# Altium PCB pechatka_100x60_fabric_v2.PcbDoc
Units mm, origin at the board's own origin, x right, y up, seen from the top; angles counter-clockwise.
Board outline 94 x 54 mm, 2 copper layers (Top Layer, Bottom Layer); 142 components, 101 nets, 463 pads, 20 vias.
Unrouted connection lines stored in the file: 48.
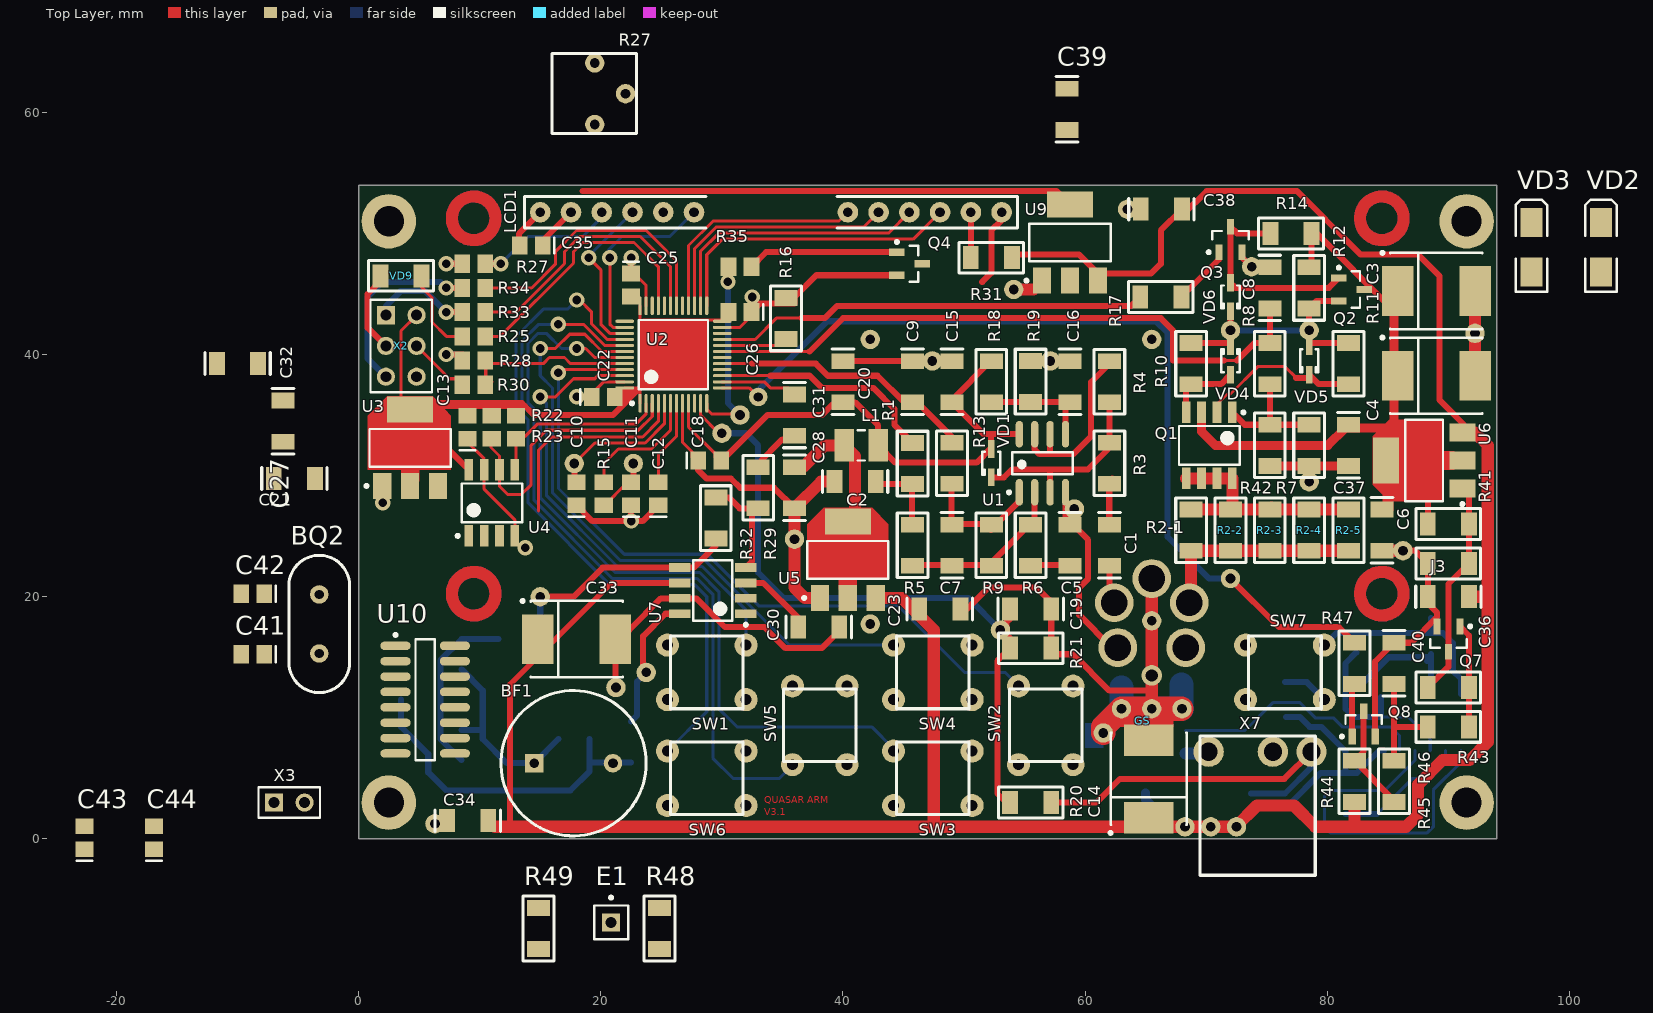
[diagram p0: Top Layer view]
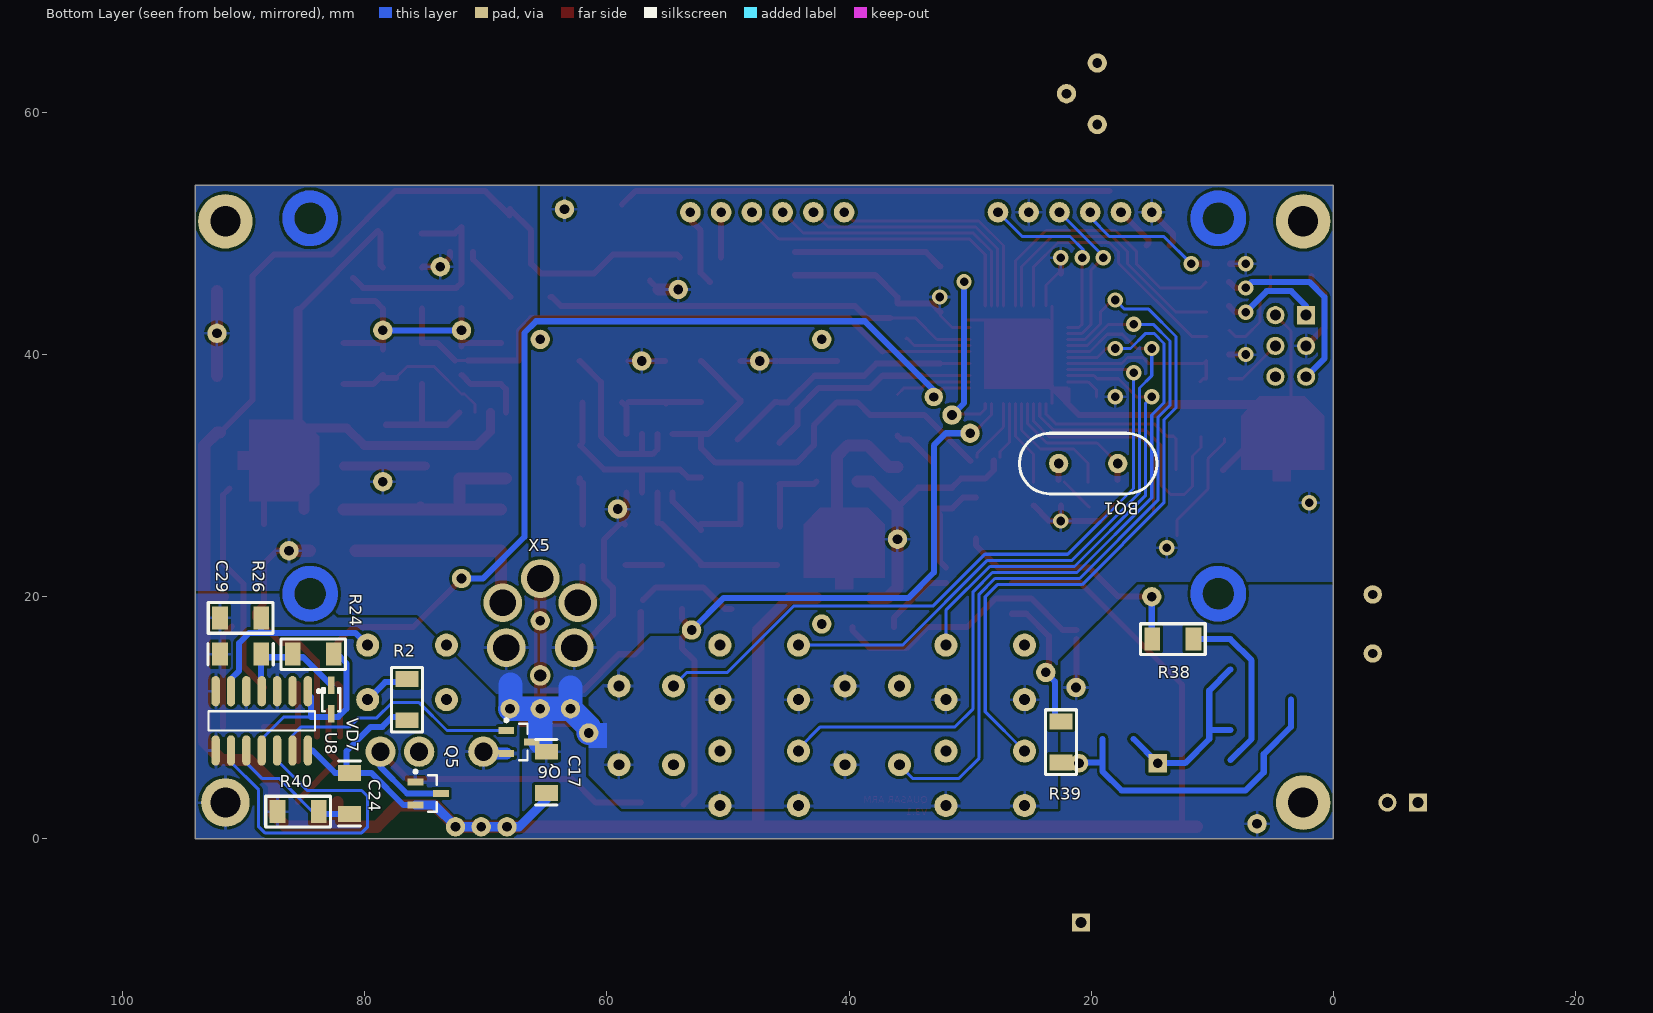
[diagram p1: Bottom Layer view, seen from below]

## Layer stack, top to bottom
Top Solder: solder mask 0.0102, Solder Resist, Dk 3.5
Top Layer: signal copper 0.0356
Dielectric 1: dielectric 0.32, FR-4, Dk 4.8
Bottom Layer: signal copper 0.0356
Bottom Solder: solder mask 0.0102, Solder Resist, Dk 3.5

## Board outline
0,0 94,0 94,54 0,54

## Design rules (kind name [scope] priority, off if disabled: settings)
Clearance Clearance_GS [InComponent('GS') vs InComponent('C14')] p1: gap=-10 ignorepadtopadclearanceinfootprint=FALSE except(0: Arc-Hole Track-Hole SMDPad-Hole THPad-Hole Via-Hole Fill-Hole Poly-Hole Region-Hole Text-Hole)
Clearance [All] p2: gap=0.25 ignorepadtopadclearanceinfootprint=FALSE except(0: Arc-Hole Track-Hole SMDPad-Hole THPad-Hole Via-Hole Fill-Hole Poly-Hole Region-Hole Text-Hole)
ComponentClearance ComponentClearance_GS [InComponent('GS') vs InComponent('C14')] p1: gap=0 collisioncheckmode=3 verticalgap=0.254 showdistances=FALSE
ComponentClearance [All] p2: gap=0.254 collisioncheckmode=3 verticalgap=0.254 showdistances=FALSE
MatchedLengths MatchLengths_xSignals_C14_C36_1 [InxSignalClass('xSignals_C14_C36_MatchLengthsClass')] p1: tolerance=2.54 checknetsindiffpair=FALSE checkdiffpairvsdiffpair=TRUE checkxsignals=TRUE checkothers=TRUE
MatchedLengths MatchLengths_C14_Passives_C36 [InxSignalClass('xSignals_C14_Passives_C36_MatchLengthsClass')] p2: tolerance=2.54 checknetsindiffpair=FALSE checkdiffpairvsdiffpair=TRUE checkxsignals=TRUE checkothers=TRUE
MatchedLengths MatchLengths_xSignals_C14_Passives [InxSignalClass('xSignals_C14_Passives_MatchLengthsClass')] p3: tolerance=2.54 checknetsindiffpair=FALSE checkdiffpairvsdiffpair=TRUE checkxsignals=TRUE checkothers=TRUE
MatchedLengths MatchLengths_xSignals_C14_C36 [InxSignalClass('xSignals_C14_C36_MatchLengthsClass')] p4: tolerance=2.54 checknetsindiffpair=FALSE checkdiffpairvsdiffpair=TRUE checkxsignals=TRUE checkothers=TRUE
PolygonConnect [All] p1: connectstyle=Relief reliefconductorwidth=0.254 reliefentries=4 polygonreliefangle="90 Angle" airgapwidth=0.254
RoutingVias [All] p1: holewidth=0.711 width=1.27 viastyle="Through Hole" minholewidth=0.711 minwidth=1.27 maxholewidth=0.711 maxwidth=1.27
SolderMaskExpansion [All] p1: expansion=0.102
Width [All] p1: maxlimit=3 minlimit=0.25 preferedwidth=0.254 minimp=50.000000 maximp=50.000000 favimp=50.000000
29 further rules are at their usual default settings.

## Classes and differential pairs
component class Transmitter: C3 C4 C6 C8 Q1 Q2 Q3 R2-1 R2-2 R2-3 R2-4 R2-5 R7 R8 R10 R11 R12 R14 R17 R42 VD2 VD3 VD4 VD5 VD6
component class SoundBlock: BF1 BQ2 C30 C31 C32 C33 C34 C41 C42 C43 C44 E1 R29 R32 R38 R39 R48 R49 U7 U10 X3
component class ReceiverBlock: C1 C2 C5 C7 C9 C15 C16 R1 R3 R4 R5 R6 R9 R13 R18 R19 U1 VD1 X5
component class "Power block": C14 C17 C18 C19 C20 C21 C22 C23 C24 C25 C26 C27 C28 C29 C36 C37 C38 C39 C40 GS J3 L1 Q5 Q6 Q7 Q8 R2 R2-1 R20 R21 R24 R26 R40 R41 R43 R44 R45 R46 R47 SW7 U3 U5 U6 U8 U9 VD7 X7
component class "Microcontroller block": BQ1 C10 C11 C12 C13 C35 LCD1 Q4 R15 R16 R22 R23 R25 R27 R28 R30 R31 R33 R34 R35 U2 U4 VD9 X2
component class Keyboard_on_board: SW1 SW2 SW3 SW4 SW5 SW6

## Components (designator, comment, footprint, x,y, rotation, side; value= is the part's Value field where it differs from the comment)
BF1 "SOUND" HCM12A 17.75,6.25 r0 top
BQ1 "8,0 MHz" "HC-49/U3H (low profile)"#1 20.25,31 r180 bottom
BQ2 "32768" "HC-49/U3H (low profile)"#2 -3.25,17.75 r270 top
C1 "0.1uF" 1206_SMD_CAPACITOR 62,24.25 r90 top
C2 "4700" 1206_SMD_CAPACITOR 41,29.5 r0 top
C3 "1000.0uF" E 89,45.25 r0 top
C4 "1000.0uF" E 89,38.25 r0 top
C5 "0.033" 1206_SMD_CAPACITOR 58.75,24.25 r90 top
C6 "0.1uF" 1206_SMD_CAPACITOR 84.5,25.5 r270 top
C7 "22pF" 1206_SMD_CAPACITOR 49,24.25 r270 top
C8 "4.7uF" 1206_SMD_CAPACITOR 75.25,45.5 r270 top
C9 "4700" 1206_SMD_CAPACITOR 45.75,37.75 r270 top
C10 "22pF" 0805 18,28.5 r90 top
C11 "22pF" 0805 22.5,28.5 r90 top
C12 "0.1uF" 0805 24.75,28.5 r90 top
C13 "0.1uF" 0805 9,34 r90 top
C14 "470.0uF" E 65.25,4.95 r90 top
C15 "1.0uF" 1206_SMD_CAPACITOR 49,37.75 r90 top
C16 "10uF" 1206_SMD_CAPACITOR 58.75,37.75 r270 top
C17 "0.1uF" 1206_SMD_CAPACITOR 65,5.5 r270 bottom
C18 "0.1uF" 0805 29,31.25 r0 top
C19 "0.1uF" 1206_SMD_CAPACITOR 55.5,19 r180 top
C20 "0.1uF" 1206_SMD_CAPACITOR 40,37.75 r270 top
C21 "10uF" 1206_SMD_CAPACITOR -5.3,29.75 r0 top
C22 "0.1uF" 0805 20.2,36.5 r0 top
C23 "0.1uF" 1206_SMD_CAPACITOR 48,19 r180 top
C24 "1uF" 1206_SMD_CAPACITOR 81.25,3.75 r90 bottom
C25 "0.1uF" 0805 22.5,45.75 r270 top
C26 "0.1uF" 0805 31.5,43.5 r180 top
C27 "10uF" 1206_SMD_Capacitor -6.25,34.5 r90 top
C28 "10uF" 1206_SMD_CAPACITOR 36,29 r90 top
C29 "1uF" 1206_SMD_CAPACITOR 90.25,15.25 r180 bottom
C30 "1uF" 1206_SMD_CAPACITOR 38,17.5 r180 top
C31 "1uF" 1206_SMD_CAPACITOR 36,35 r270 top
C32 "4700" 1206_SMD_CAPACITOR -10,39.25 r180 top
C33 "470.0uF" E 18,16.5 r0 top
C34 "0.1uF" 1206_SMD_CAPACITOR 9,1.5 r180 top
C35 "10uF" 0805 14.25,49 r180 top
C36 "0.1uF" 1206_SMD_CAPACITOR 90,20 r0 top
C37 "10uF" 1206_SMD_CAPACITOR 81.75,32.5 r90 top
C38 "0.1uF" 1206_SMD_Capacitor 66.3,52 r0 top
C39 "10uF" 1206_SMD_Capacitor 58.5,60.25 r90 top
C40 "0.1uF" 1206_SMD_Capacitor 85.5,14.5 r270 top
C41 "22pF" 0805 -8.75,15.25 r180 top
C42 "22pF" 0805 -8.75,20.25 r180 top
C43 "0.1uF" 0805 -22.65,0.1 r90 top
C44 "0.1uF" 0805 -16.9,0.1 r90 top
E1 "Antenna" PIN1 20.85,-6.9 r0 top
GS "Ground setter" GND_POINT 65,8.75 r90 top net-tie
J3 "Устанавливается при отсутствии модуля USER_PWM" 1206_SMD_Resistor 90,22.75 r180 top
L1 "Inductor" 1210 41.5,32.5 r0 top value=100mH
LCD1 "WH1602B" WS1602B-3 15,51.75 r0 top locked
Q1 "IRF7105" SO-2 70.25,32.5 r270 top
Q2 "BC846B" SOT23_N 82,45.375 r0 top
Q3 "BC846B" SOT23_N 72,49.5 r90 top
Q4 "BC846B" SOT23_N 45.5,47.5 r0 top
Q5 "IRLML6401" SOT23_N 74.75,3.75 r180 bottom
Q6 "IRLML0030" SOT23_N 67.25,8 r180 bottom
Q7 "IRLML0030" SOT23_N 90,16.5 r270 top
Q8 "BC846B" SOT23_N 83,9.5 r90 top
R1 "2K" 1206_SMD_Resistor 45.75,31 r270 top
R2 "10" 1206_SMD_Resistor 76.5,11.5 r270 bottom
R2-1 "51" 1206_SMD_Resistor 68.75,25.5 r90 top
R2-2 "51" 1206_SMD_Resistor 72,25.5 r90 top
R2-3 "51" 1206_SMD_Resistor 75.25,25.5 r90 top
R2-4 "51" 1206_SMD_Resistor 78.5,25.5 r90 top
R2-5 "47" 1206_SMD_Resistor 81.75,25.5 r90 top
R3 "100" 1206_SMD_Resistor 62,31.023 r270 top
R4 "2K0" 1206_SMD_Resistor 62,37.75 r90 top
R5 "100K" 1206_SMD_Resistor 45.75,24.25 r270 top
R6 "1K2" 1206_SMD_Resistor 55.5,24.25 r270 top
R7 "1R" 1206_SMD_Resistor 78.5,32.5 r270 top
R8 "10K" 1206_SMD_Resistor 75.25,39.25 r270 top
R9 "100K" 1206_SMD_Resistor 52.25,24.25 r90 top
R10 "1K" 1206_SMD_Resistor 68.75,39.25 r270 top
R11 "1K" 1206_SMD_Resistor 81.75,39.25 r270 top
R12 "100K" 1206_SMD_Resistor 78.5,45.5 r90 top
R13 "2K" 1206_SMD_Resistor 49,31.023 r90 top
R14 "10K" 1206_SMD_Resistor 77,50 r0 top
R15 "390" "0805 Resistor" 20.25,28.5 r90 top
R16 "10K" 1206_SMD_Resistor 35.302,42.979 r90 top
R17 "1K" 1206_SMD_Resistor 66.25,44.75 r180 top
R18 "10K" 1206_SMD_Resistor 52.25,37.75 r90 top
R19 "10K" 1206_SMD_Resistor 55.5,37.773 r270 top
R20 "390" 1206_SMD_Resistor 55.5,3 r180 top
R21 "390" 1206_SMD_Resistor 55.5,15.75 r180 top
R22 "4K7" "0805 Resistor" 11,34 r270 top
R23 "4K7" "0805 Resistor" 13,34 r90 top
R24 "470K" 1206_SMD_Resistor 84.25,15.25 r180 bottom
R25 "1K" "0805 Resistor" 9.5,41.5 r0 top
R26 "100K" 1206_SMD_Resistor 90.25,18.25 r180 bottom
R27 "Comment" "0805 Resistor" 9.5,47.5 r180 top
R27 "10K" 3362P 19.5,59 r90 top
R28 "10K" "0805 Resistor" 9.5,39.5 r0 top
R29 "10K" 1206_SMD_Resistor 33,29 r270 top
R30 "1K" "0805 Resistor" 9.5,37.5 r0 top
R31 "200" 1206_SMD_Resistor 52.25,48 r180 top
R32 "33K" 1206_SMD_Resistor 29.5,26.5 r270 top
R33 "100" "0805 Resistor" 9.5,43.5 r180 top
R34 "100" "0805 Resistor" 9.5,45.5 r180 top
R35 "1K" "0805 Resistor" 31.5,47.254 r0 top
R38 "2R" 1206_SMD_Resistor 13.25,16.5 r180 bottom
R39 "2R" 1206_SMD_Resistor 22.5,8 r270 bottom
R40 "100K" 1206_SMD_Resistor 85.5,2.25 r180 bottom
R41 "330" 1206_SMD_Resistor 90,26 r180 top
R42 "1R" 1206_SMD_Resistor 75.25,32.5 r270 top
R43 "470K" 1206_SMD_Resistor 90,12.5 r0 top
R44 "1.2K" 1206_SMD_Resistor 82.25,4.75 r270 top
R45 "18K" 1206_SMD_Resistor 85.5,4.75 r90 top
R46 "240K" 1206_SMD_Resistor 90,9.25 r0 top
R47 "1K" 1206_SMD_Resistor 82.25,14.5 r270 top
R48 "10K" 1206_SMD_Resistor 24.85,-7.4 r90 top
R49 "10K" 1206_SMD_Resistor 14.85,-7.4 r90 top
SW1 "\"OK\"" KAN0611 28.75,13.75 r90 top
SW2 "\"Right\"" KAN0611 56.75,9.375 r180 top
SW3 "\"Down\"" KAN0611 47.417,5 r90 top
SW4 "\"Up\"" KAN0611 47.417,13.75 r90 top
SW5 "\"Left\"" KAN0611 38.083,9.375 r180 top
SW6 "\"Menu / Esc\"" KAN0611 28.75,5 r90 top
SW7 "\"PWR On/Off\"" KAN0611 76.5,13.75 r90 top
U1 "MCP6022" SOIC-SN8_N 56.468,31.023 r90 top
U2 "STM32F100C8T6" LQFP-48_L 26,40 r90 top
U3 "NCP1117ST33T3G" SOT-223 4.25,32.3 r90 top
U4 "M24C16WMN6" SO-8 11,27.75 r90 top
U5 "NCP1117ST33T3G" SOT-223 40.4,23.05 r90 top
U6 "NCP1117ST50T3G" SOT-223 88,31.25 r180 top
U7 "MC34119D" SO-8 29.25,20.5 r180 top
U8 "CD4013BCM" M14A_M 88.5,9.75 r270 bottom
U9 "NCP1117ST50T3G" SOT-223 58.75,49.25 r90 top
U10 "KT0803L" SOIC16N_M 5.5,11.5 r0 top
VD1 "1N4148" SOD-323 52.25,31.023 r270 top
VD2 "SS16" SMA 102.6,48.85 r90 top
VD3 "SS16" SMA 96.85,48.85 r90 top
VD4 "1N4148" SOD-323 72,39.5 r90 top
VD5 "1N4148" SOD-323 78.5,39.5 r270 top
VD6 "1N4148" SOD-323 72,44.75 r270 top
VD7 "1N4148" SOD-323 82.75,11.5 r90 bottom
VD9 "LED0" 1206_SMD_Resistor 3.5,46.5 r180 top
X2 "USART" HDR2X3 2.25,43.25 r270 top
X3 "SOUND" HDR1X2 -7,3 r0 top
X5 "COIL" GX16-5 65.5,18 r180 bottom
X7 "POWER" DC-044 75.5,1 r0 top

## Footprints (in the part's own frame and the unit in brackets; to place one, negate y for a bottom-side part, rotate by r counter-clockwise, add the part's x,y. Pads: shape width x height; smd on the part's side, far side on the other; paste and mask are expansions set on the pad)
0805 [mm] "Chip Capacitor; Body 2.0 x 1.2 mm (LxW typ)"
  rect 1.3x1.5 smd: 1(-0.95,0) 2(0.95,0)
  silkscreen extent -1.9,-0.65 -1.9,0.65
"0805 Resistor" [mm] "Chip Resistor; Body 2 x 1.2 mm (LxW typ)"
  rect 1.3x1.5 smd: 1(-0.95,0) 2(0.95,0)
1206_SMD_CAPACITOR [mm]
  rect 1.3x1.9 smd: 1(-1.7,0) 2(1.7,0)
  silkscreen extent -2.7,-0.9 2.7,0.9
1206_SMD_Capacitor [mm]
  rect 1.3x1.9 smd: 1(-1.7,0) 2(1.7,0)
  silkscreen extent -2.7,-0.9 2.7,0.9
1206_SMD_Resistor [mm]
  rect 1.3x1.9 smd: 1(-1.7,0) 2(1.7,0)
  silkscreen extent -2.67,-1.27 2.67,1.27
1210 [mm] "Chip Resistor; Body 3.2 x 2.5 mm (LxW typ)"
  rect 1.6x2.7 smd: 1(-1.4,0) 2(1.4,0)
  silkscreen extent -0.3,-1.25 0.3,1.25
3362P [mm] "Chip Resistor; Body 2 x 1.2 mm (LxW typ)"
  round 1.6 hole 0.8: 1(0,0) 2(2.54,-2.54) 3(5.08,0)
  silkscreen extent -0.74,-3.46 5.86,3.53
DC-044 [mm] "Разъем питания штыревой на плату, 5.5 x 2.5 мм"
  rect 2x2 on Keep-Out: 1(0,0)
  round 2.5 hole 1.5: 2(-5.3,6.2) 3(0,6.2) 4(3.2,6.2)
  silkscreen extent -6,-4 3.5,7.5, body extent -6,-4 3.5,7.5, height 7
E [mm] "Capacitor, SM Tantalum; Body 7.3 x 6.0 mm (LxW typ)"
  rect 2.6x4.1 smd: 1(-3.2,0) 2(3.2,0)
  silkscreen extent -4.57,-3.15 3.8,3.27
GND_POINT [mm]
  round 1.6 hole 0.8: 1(2,-0.5) 2(0,3.5) 3(2,-3) 4(2,2)
  Top Layer lines w2: 0,3.5 0.5,3.5 2,2 2,0 2,-0.5 ; 2,-2.96 2,-0.5 ; 2,-0.5 2,-0.5
  Bottom Layer lines w2: 0,3.5 0.5,3.5 2,2 2,0 2,-3
GX16-5 [mm] "GX16-5 connector"
  round 3.2 hole 2.2: 1(2.8,-2.2) 2(3.1,1.5) 3(0,3.5) 4(-3.1,1.5) 5(-2.8,-2.2)
  body extent -9,-9 9,9, height 19.1
"HC-49/U3H (low profile)"#1 [mm] "QUARTZ CRYSTALS HC-49/U3H (low profile)"
  round 1.6 hole 0.8: 1(-2.44,0) 2(2.44,0)
  silkscreen extent -5.67,-2.5 5.67,2.5
"HC-49/U3H (low profile)"#2 [mm] "QUARTZ CRYSTALS HC-49/U3H (low profile)"
  round 1.524 hole 0.762: 1(-2.44,0) 2(2.44,0)
  silkscreen extent -5.67,-2.5 5.67,2.5
HCM12A [mil] "Electro-Magnetic Sound Generators"
  rect 60x60 hole 31.5: 1(-127.95,0)
  round 60 hole 31.5: 2(127.95,0)
  silkscreen extent -236,-236 236,236, body extent -236,-236 236,236, height 374
HDR1X2 [mm] "Connector; Header; 2 Position"
  rect 1.5x1.5 hole 0.9: 1(0,0)
  round 1.5 hole 0.9: 2(2.54,0)
  silkscreen extent -1.27,-1.27 3.81,1.27
HDR2X3 [mm] "Connector; Header; 3x2 Position"
  rect 1.5x1.5 hole 0.9: 1(0,0)
  round 1.5 hole 0.9: 2(0,2.54) 3(2.54,0) 4(2.54,2.54) 5(5.08,0) 6(5.08,2.54)
  silkscreen extent -1.27,-1.27 6.35,3.81
KAN0611 [mm]
  round 1.9 hole 0.9: 1(2.25,3.25) 1(2.25,-3.25) 2(-2.25,3.25) 2(-2.25,-3.25)
  silkscreen extent -3,-3 3,3, body extent -3,-3 3,3, height 7
LQFP-48_L [mm] "Thin QFP, 48-Leads, Body 7x7mm, Pitch 0.5mm, IPC High Density"
  oval 1.55x0.25 smd: 1(-4.025,2.75) 2(-4.025,2.25) 3(-4.025,1.75) 4(-4.025,1.25) 5(-4.025,0.75) 6(-4.025,0.25) 7(-4.025,-0.25) 8(-4.025,-0.75) 9(-4.025,-1.25) 10(-4.025,-1.75) 11(-4.025,-2.25) 12(-4.025,-2.75) 25(4.025,-2.75) 26(4.025,-2.25) 27(4.025,-1.75) 28(4.025,-1.25) 29(4.025,-0.75) 30(4.025,-0.25) 31(4.025,0.25) 32(4.025,0.75) 33(4.025,1.25) 34(4.025,1.75) 35(4.025,2.25) 36(4.025,2.75)
  oval 0.25x1.55 smd: 13(-2.75,-4.025) 14(-2.25,-4.025) 15(-1.75,-4.025) 16(-1.25,-4.025) 17(-0.75,-4.025) 18(-0.25,-4.025) 19(0.25,-4.025) 20(0.75,-4.025) 21(1.25,-4.025) 22(1.75,-4.025) 23(2.25,-4.025) 24(2.75,-4.025) 37(2.75,4.025) 38(2.25,4.025) 39(1.75,4.025) 40(1.25,4.025) 41(0.75,4.025) 42(0.25,4.025) 43(-0.25,4.025) 44(-0.75,4.025) 45(-1.25,4.025) 46(-1.75,4.025) 47(-2.25,4.025) 48(-2.75,4.025)
  silkscreen extent -4.15,-2.85 2.85,3.55, body extent -3.5,-3.5 3.5,3.5, height 1.6
M14A_M [mm] "SOIC, 14-Leads, Body 8.6x3.9mm, Pitch 1.27mm, IPC Low Density"
  oval 2.5x0.7 smd: 1(-2.45,3.81) 2(-2.45,2.54) 3(-2.45,1.27) 4(-2.45,0) 5(-2.45,-1.27) 6(-2.45,-2.54) 7(-2.45,-3.81) 8(2.45,-3.81) 9(2.45,-2.54) 10(2.45,-1.27) 11(2.45,0) 12(2.45,1.27) 13(2.45,2.54) 14(2.45,3.81)
  silkscreen extent -2.57,-4.4 0.8,4.83, body extent -2,-4.38 2,4.38, height 1.75
PIN1 [mm] "Generic Antenna; 1 Lead"
  rect 1.5x1.5 hole 0.9: 1(0,0)
  silkscreen extent -1.4,-1.4 1.4,2.17
SMA [mm] "DO-214-AC/SMA; 2 C-Bend Leads; Body 5 x 2.7 mm, inc. leads (LxW)"
  rect 2.4x1.8 smd: 1(-2.05,0) 2(2.05,0)
  silkscreen extent -3.65,-1.3 3.95,1.3
SO-2 [mm] "SOIC, 8-Leads, Body 4,90x3,90mm, Pitch 1,27mm, IPC Medium Density"
  rect 1.78x0.72 smd: 1(-2.725,1.905) 2(-2.725,0.635) 3(-2.725,-0.635) 4(-2.725,-1.905) 5(2.725,-1.905) 6(2.725,-0.635) 7(2.725,0.635) 8(2.725,1.905)
  silkscreen extent -2.85,-2.5 1.6,2.94, body extent -2,-2.5 2,2.5, height 1.75
SO-8 [mm] "SOIC, 8-Leads, Body 4,90x3,90mm, Pitch 1,27mm, IPC Medium Density"
  rect 1.78x0.72 smd: 1(-2.725,1.905) 2(-2.725,0.635) 3(-2.725,-0.635) 4(-2.725,-1.905) 5(2.725,-1.905) 6(2.725,-0.635) 7(2.725,0.635) 8(2.725,1.905)
  silkscreen extent -2.85,-2.5 1.6,2.94, body extent -2,-2.5 2,2.5, height 1.75
SOD-323 [mm] "SOD-323/SC-76; 2 Leads; Body 1.7 x 1.3 mm, (LxW)"
  rect 1.45x0.55 smd: 1(1.175,0) 2(-1.175,0)
  silkscreen extent -0.95,-0.75 0.95,0.75
SOIC16N_M [mm] "16-Pin Small Outline Integrated Circuit 1.27 mm Pitch, IPC Low Density"
  oval 2.5x0.7 smd: 1(-2.45,4.445) 2(-2.45,3.175) 3(-2.45,1.905) 4(-2.45,0.635) 5(-2.45,-0.635) 6(-2.45,-1.905) 7(-2.45,-3.175) 8(-2.45,-4.445) 9(2.45,-4.445) 10(2.45,-3.175) 11(2.45,-1.905) 12(2.45,-0.635) 13(2.45,0.635) 14(2.45,1.905) 15(2.45,3.175) 16(2.45,4.445)
  silkscreen extent -2.57,-5 0.8,5.47, body extent -2,-5 2,5, height 1.75
SOIC-SN8_N [mm] "SOIC, 8-Leads, Body 4.9x3.8mm, Pitch 1.27mm, IPC Medium Density"
  oval 2.2x0.6 smd: 1(-2.4,1.905) 2(-2.4,0.635) 3(-2.4,-0.635) 4(-2.4,-1.905) 5(2.4,-1.905) 6(2.4,-0.635) 7(2.4,0.635) 8(2.4,1.905)
  silkscreen extent -2.52,-2.5 0.9,2.88, body extent -2,-2.5 2,2.5, height 1.75
SOT23_N [mm] "SOT23, 3-Leads, Body 2.9x1.3mm, Pitch 0.95mm, Lead Span 2.3mm, IPC Medium Density"
  rect 1.3x0.6 smd: 1(-1.05,0.95) 2(-1.05,-0.95) 3(1.05,0)
  silkscreen extent -1.17,-1.5 0.7,1.92, body extent -0.7,-1.5 0.7,1.5, height 1.1
SOT-223 [mm] "SOT223, 4-Leads, Body 6,50x7,00mm (avg), Pitch 2,30mm, IPC Medium Density"
  rect 2.15x1.5 smd: 1(-3.15,2.3) 2(-3.15,0) 3(-3.15,-2.3)
  rect 2.15x3.8 smd: 4(3.15,0)
  silkscreen extent -3.27,-3.35 1.55,3.72, body extent -1.85,-3.35 1.85,3.35, height 1.8
WS1602B-3 [mm]
  round 1.7 hole 0.8: 1(0,0) 2(2.54,0) 3(5.08,0) 4(7.62,0) 5(10.16,0) 6(12.7,0) 11(25.4,0) 12(27.94,0) 13(30.48,0) 14(33.02,0) 15(35.56,0) 16(38.1,0)
  Top Layer circle w1: c-5.5,-0.5 r1.8
  Top Layer circle w1: c-5.5,-31.5 r1.8
  Top Layer circle w1: c69.5,-31.5 r1.8
  Top Layer circle w1: c69.5,-0.5 r1.8
  Bottom Layer circle w1: c69.5,-0.5 r1.8
  Bottom Layer circle w1: c69.5,-31.5 r1.8
  Bottom Layer circle w1: c-5.5,-31.5 r1.8
  Bottom Layer circle w1: c-5.5,-0.5 r1.8
  silkscreen extent -1.3,-1.3 39.4,1.3, body extent -7.9,-33.99 72.1,2.01, height 20

## Part data
BF1: library part "Elrctro-Magnetic Sound Generator", "Magnetic Transducer Buzzer", ComponentLink1Description="Manufacturer Link", ComponentLink1URL=http://www.megastar.com/linecard/buzzmode/index.php, DatasheetVersion=17-Dec-2003, LatestRevisionDate=17-Dec-2003, LatestRevisionNote="Schematic revised, PCB Footprint replaced.", PackageDescription="Magnetic Transducer Buzzer", PackageReference=ABSM-1574, Published=24-Mar-1999, Publisher="Altium Limited"
BQ1: library part XTAL, "Crystal Oscillator", Frequence="8,0 MHz", LatestRevisionDate=17-Jul-2002, LatestRevisionNote="Re-released for DXP Platform.", PackageDescription="Crystal, Thru-Hole; 2 Leads; Body 3.1 x 8.2 mm (Dia.xH)", PackageReference=R38, Published=8-Jun-2000, Publisher="Altium Limited"
BQ2: library part XTAL, "Crystal Oscillator", Frequence="8,0 MHz", LatestRevisionDate=17-Jul-2002, LatestRevisionNote="Re-released for DXP Platform.", PackageDescription="Crystal, Thru-Hole; 2 Leads; Body 3.1 x 8.2 mm (Dia.xH)", PackageReference=R38, Published=8-Jun-2000, Publisher="Altium Limited"
C1 C2 C5 C6 C7 C8 C9 C10 C11 C12 C13 C15 C16 C17 C18 C19 C20 C21 C22 C23 C24 C25 C26 C27 C28 C29 C30 C31 C32 C34 C35 C36 C37 C38 C39 C40 C41 C42 C43 C44: library part "Capacitor SMD", "Capacitor", LatestRevisionDate=17-Jul-2002, LatestRevisionNote="Re-released for DXP Platform.", PackageReference=RAD-0.3, Published=8-Jun-2000, Publisher="Altium Limited"
C3 C4 C14 C33: library part "Cap Pol1", "Polarized Capacitor (Radial)", LatestRevisionDate=17-Jul-2002, LatestRevisionNote="Re-released for DXP Platform.", PackageDescription="Polarized Capacitor (Radial); 2 Leads", PackageReference=RB7.6-15, Published=8-Jun-2000, Publisher="Altium Limited"
E1: "Generic Antenna", LatestRevisionDate=17-Jul-2002, LatestRevisionNote="Re-released for DXP Platform.", PackageReference=PIN1, Published=24-Mar-1999, Publisher="Altium Limited"
J3: library part Jumper, "Jumper Wire", LatestRevisionDate=17-Jul-2002, LatestRevisionNote="Re-released for DXP Platform.", PackageDescription="Radial Cap, Thru-Hole; 2 Leads; 0.2 in Pin Spacing", PackageReference=RAD-0.2, Published=24-Mar-1999, Publisher="Altium Limited"
LCD1: "Символьный ЖКИ разрешением 16 символов на 2 строки"
Q2 Q3 Q4 Q8: "NPN General-purpose Transistor", ComponentLink1Description="Manufacturer Link", ComponentLink1URL=http://www.semiconductors.philips.com/, ComponentLink2Description=Datasheet, ComponentLink2URL=http://www.semiconductors.philips.com/acrobat/datasheets/BC846_BC847_BC848_5.pdf, DatasheetVersion=4-Feb-2002, LatestRevisionDate=12-Dec-2006, LatestRevisionNote="IPC-7351 Footprint Added.", PackageDescription="3-Pin SOT-23 Package 0.95 mm Pitch, 2.3 mm Lead Span", PackageReference=SOT23, PackageVersion=May-1999, Published=17-Sep-2003, Publisher="Altium Limited"
Q5: "HEXFET Power MOSFET", ComponentLink1Description="Manufacturer Link", ComponentLink1URL=http://www.irf.com/, ComponentLink2Description=Datasheet, ComponentLink2URL=http://www.irf.com/product-info/datasheets/data/IRLML6401.pdf, DatasheetVersion=2-Jul-2001, PackageDescription="3-Pin SOT-23 Package 0.95 mm Pitch, 2.3 mm Lead Span", PackageReference=Micro3, PackageVersion=Jul-2001, Published=17-Sep-2003, Publisher="Altium Limited"
Q6 Q7: library part 2N7002, "HEXFET Power MOSFET", ComponentLink1Description="Manufacturer Link", ComponentLink1URL=http://www.irf.com/, ComponentLink2Description=Datasheet, ComponentLink2URL=http://www.irf.com/product-info/datasheets/data/IRLML6401.pdf, DatasheetVersion=2-Jul-2001, PackageDescription="3-Pin SOT-23 Package 0.95 mm Pitch, 2.3 mm Lead Span", PackageReference=Micro3, PackageVersion=Jul-2001, Published=17-Sep-2003, Publisher="Altium Limited"
R1 R2 R2-1 R2-2 R2-3 R2-4 R2-5 R3 R4 R5 R6 R7 R8 R9 R10 R11 R12 R13 R14 R15 R16 R17 R18 R19 R20 R21 R22 R23 R24 R25 R26 R28 R29 R30 R31 R32 R33 R34 R35 R38 R39 R40 R41 R42 R43 R44 R45 R46 R47 R48 R49: library part Resistor, "Resistor"
  R1 R2-1 R2-2 R2-3 R2-4 R2-5 R4 R7 R8 R10 R11 R12 R14 R15 R16 R17 R20 R21 R22 R23 R25 R28 R29 R30 R31 R32 R33 R34 R35 R38 R39 R42: LatestRevisionDate=17-Jul-2002, LatestRevisionNote="Re-released for DXP Platform.", PackageDescription="Axial Device, Thru-Hole; 2 Leads; 0.4 in Pin Spacing", PackageReference=AXIAL-0.4, Published=8-Jun-2000, Publisher="Altium Limited"
  R2 R3 R5 R6 R9 R13 R18 R19 R24 R26 R40 R41 R43 R44 R45 R46 R47 R48 R49: Published=31-Aug-2014, Publisher="Dmitry Kuzmin"
R27: library part "Trimming Potentiometer", "Square Trimming Potentiometer", ComponentLink1Description="Manufacturer Link", ComponentLink1URL=http://bourns.com/2/search.html, DatasheetVersion=Oct-2003, PackageDescription="Square Trimming Potentiometer", PackageReference=POT4MM-2, Published=17-Dec-2003, Publisher="Altium Limited"
SW1 SW2 SW3 SW4 SW5 SW6: library part "TACT Switch", "Single-Pole, Single-Throw Switch", LatestRevisionDate=17-Jul-2002, LatestRevisionNote="Re-released for DXP Platform.", PackageDescription="Switch; 2 Leads", PackageReference=SPST-2, Published=24-Mar-1999, Publisher="Altium Limited"
SW7: library part BUTTON_KAN1211, "Single-Pole, Single-Throw Switch", LatestRevisionDate=17-Jul-2002, LatestRevisionNote="Re-released for DXP Platform.", PackageDescription="Switch; 2 Leads", PackageReference=SPST-2, Published=24-Mar-1999, Publisher="Altium Limited"
U1: library part MCP6022-I/SN, "Rail-to-Rail Input/Output, 10 MHz Operational Amplifier, 8-Pin SOIC, Industrial Temperature", Supplier Part Number 1=MCP6022-I/SN-ND, Code_IPC=SOIC127P600-8, Code_JEDEC=MS-012, ComponentLink1Description=Datasheet, ComponentLink1URL=http://ww1.microchip.com/downloads/en/DeviceDoc/21685d.pdf, ComponentLink2Description="Packaging Specification", ComponentLink2URL=http://www.microchip.com/stellent/groups/techpub_sg/documents/packagingspec/en012702.pdf, ComponentLink3Description="Microchip.com Home", ComponentLink3URL=http://www.microchip.com/, DatasheetVersion="revD, Feb-2009", LatestRevisionDate=02-Dec-2009, LatestRevisionNote="Updated to datasheet revision D, Feb-2009", PackageDescription="8-Lead Plastic Small Outline (SN) - Narrow, 3.90mm Body [SOIC]", PackageReference=SOIC-SN8, PackageVersion="revBB, Aug-2009", Published=29-Jan-2009, Publisher="Altium Limited", Supplier 1=Digi-Key, Supplier 2=Farnell, Supplier Part Number 2=1439415
U2: library part STM32F101C8T6, "STM32 ARM-based 32-bit MCU with 64 Kbytes Flash, 48-pin LQFP, Industrial Temperature", ComponentLink1Description="Manufacturer Link", ComponentLink1URL=www.st.com/stm32, ComponentLink2Description=Datasheet, ComponentLink2URL=http://www.st.com/stonline/products/literature/ds/13586.pdf, DatasheetVersion="rev6, Mar-2008", PackageDescription="48-Pin Low-Profile Quad Flat Pack, 7 x 7 mm Body, 0.5 mm Pitch (LQFP48)", PackageReference=LQFP48, PackageVersion=Mar-2008, Published=30-May-2008, Publisher="Altium Limited"
U3 U5: library part NCP1117ST33, "LDO стабилизатор 3.3 V, 1 A, падение 1.2 V, Uвх до 20 V, 0..+125°C, 1%", Manufacturer="National Semiconductor", PackageTopMarking=NSUZXYTTE#*LM1117S*3.3, PartNumber=LM1117S-3.3, Supplier Part Number 1=1652366, Code_JEDEC=MO-169-AA, ComponentLink1Description="LM1117 Datasheet", ComponentLink1URL=http://www.national.com/ds/LM/LM1117.pdf, ComponentLink2Description="LM1117 Web Page", ComponentLink2URL=http://www.national.com/pf/LM/LM1117.html, ComponentLink3Description="TS3B Package Page", ComponentLink3URL=http://www.national.com/packaging/folders/ts3b.html, CompType="LDO IC", DatasheetVersion=Apr-2006, PackageDescription="TO-263, Molded, .400 x .390 x .180in, 3 Lead, .1in Pitch, Surface Mount", PackageReference=TS3B, PackageVersion="revF, Apr-2005", PinCount=3, Published=4-Dec-2008, Publisher="Altium Limited", RoHS=O, Supplier 1=Farnell, Supplier 2=Digi-Key, Supplier Part Number 2=NCP1117ST33T3GOSTR-ND
U4: "16Kbit Serial IІC Bus EEPROM", ComponentLink1Description="Manufacturer Link", ComponentLink1URL=http://www.st.com/, ComponentLink2Description=Datasheet, ComponentLink2URL=http://www.st.com/stonline/products/literature/ds/5067/m24c01-r.pdf, DatasheetVersion=Sep-1999, LatestRevisionDate=13-Apr-2006, LatestRevisionNote="IPC-7351 Footprint Added.", PackageDescription="8-Pin Small Outline Integrated Circuit 1.27 mm Pitch", PackageReference=SOP8, PackageVersion=Jul-1999, Published=24-Aug-2001, Publisher="Altium Limited"
U6 U9: library part NCP1117ST50, "LDO стабилизатор 5.0 V, 1 A, падение 1.2 V, Uвх до 20 V, 0..+125°C, 1%", Manufacturer="National Semiconductor", PackageTopMarking=NSUZXYTTE#*LM1117S*5.0, PartNumber=LM1117S-5.0, Supplier Part Number 1=NCP1117ST50T3GOSTR-ND, Code_JEDEC=MO-169-AA, ComponentLink1Description="LM1117 Datasheet", ComponentLink1URL=http://www.national.com/ds/LM/LM1117.pdf, ComponentLink2Description="LM1117 Web Page", ComponentLink2URL=http://www.national.com/pf/LM/LM1117.html, ComponentLink3Description="TS3B Package Page", ComponentLink3URL=http://www.national.com/packaging/folders/ts3b.html, CompType="LDO IC", DatasheetVersion=Apr-2006, PackageDescription="TO-263, Molded, .400 x .390 x .180in, 3 Lead, .1in Pitch, Surface Mount", PackageReference=TS3B, PackageVersion="revF, Apr-2005", PinCount=3, Published=4-Dec-2008, Publisher="Altium Limited", RoHS=Y, Supplier 1=Digi-Key
U7: "Low-Power Audio Amplifier", Code_IPC=SOIC127P600-8, Code_JEDEC=MS-012-AA, DatasheetVersion=1989, LatestRevisionDate=13-Apr-2006, LatestRevisionNote="IPC-7351 Footprint Added.", PackageDescription="8-Pin Small Outline Integrated Circuit 1.27 mm Pitch", PackageReference=751-03, Published=17-Jul-2002, Publisher="Altium Limited"
U8: "Dual D-Type Flip-Flop", Code_IPC=SOIC127P600-14, ComponentLink1Description="Manufacturer Link", ComponentLink1URL=http://www.fairchildsemi.com/, DatasheetVersion=Jan-1999, LatestRevisionDate=13-Apr-2006, LatestRevisionNote="IPC-7351 Footprint Added.", PackageDescription="14-Pin Small Outline Integrated Circuit 1.27 mm Pitch", PackageReference=M14A, PackageVersion=2000, Published=17-Jul-2002, Publisher="Altium Limited"
VD1 VD4 VD5 VD6 VD7: "High Conductance Fast Diode", Code_JEDEC=DO-204-AH, ComponentLink1Description="Manufacturer Link", ComponentLink1URL=http://www.fairchildsemi.com/, ComponentLink2Description=Datasheet, ComponentLink2URL=http://www.fairchildsemi.com/ds/1N%2F1N4148.pdf, DatasheetDocument=1997, LatestRevisionDate=17-Jul-2002, LatestRevisionNote="Re-released for DXP Platform.", PackageReference=DO-35, Published=8-Jun-2000, Publisher="Altium Limited"
VD2 VD3: library part Diode, "Default Diode", Code_JEDEC=DO-214-AB, LatestRevisionDate=17-Jul-2002, LatestRevisionNote="Re-released for DXP Platform.", PackageDescription="DO-214-AB/SMC; 2 C-Bend Leads; Body 7.9 x 5.9 mm, inc. leads (LxW)", PackageReference=SMC, PackageVersion=Sep-1996, Published=8-Jun-2000, Publisher="Altium Limited"
VD9: "Typical INFRARED GaAs LED", LatestRevisionDate=08-Jul-2005, LatestRevisionNote="Mech Layer 1 removed.", PackageDescription="LED; 2 Leads", PackageReference=LED-0, Published=8-Jun-2000, Publisher="Altium Limited"
X2: library part "Header 3X2", "Header, 3-Pin, Dual row", LatestRevisionDate=17-Jul-2002, LatestRevisionNote="Re-released for DXP Platform.", Publisher="Altium Limited"
X3: library part "Header 2", "Header, 2-Pin", LatestRevisionDate=17-Jul-2002, LatestRevisionNote="Re-released for DXP Platform.", Publisher="Altium Limited"
X5: library part "Jack 5p", "Jack, 5 pin", LatestRevisionDate=17-Jul-2002, LatestRevisionNote="Re-released for DXP Platform.", Publisher="Altium Limited"
X7: library part DC-044, "Low Voltage Power Supply Connector", ComponentLink1Description="Manufacturer Link", ComponentLink1URL=http://domino.kycon.com/internet/Products.html, DatasheetDocument=09-May-2002, Published=17-Dec-2003, Publisher="Altium Limited"
L1: Code_IEC=1005, Code_JEITA=0402, LatestRevisionDate=29-May-2009, LatestRevisionNote="IPC-7351 Footprint Added.", PackageDescription="Chip Inductor", PackageReference=0402-A, Published=8-Jun-2000, Publisher="Altium Limited"

## Free pads (board coordinates)
  round 1.6 hole 0.8: 0(42.25,17.75) 0(42.25,41.25) 0(65.5,41.25) 29(31.5,35) 30(59.113,27.238) 31(47.38,39.473) 39(30,33.5) 40(57.125,39.473) 41(65.5,18.007) 42(78.5,29.5) 46(92.2,41.75) 47(73.75,47.25) 61(78.5,42) 62(72,42) 63(86.25,23.8) 64(36,24.75) 65(23.75,13.75) 66(15,20) 67(21.25,12.5) 68(68.25,1) 70(54.104,45.373) 71(6.3,1.25) 72(53,17.25) 73(63.5,52) 74(70.375,1) 75(72.5,1) 77(72,21.5)
  round 1.524 hole 0.762: 78(33,36.5)
  round 1.7 hole 1: 80(65.5,13.5)
  round 4.5 hole 2.5 unplated: ""(2.5,3) ""(2.5,51) ""(91.5,51)
  round 4.5 / inner round 4.5 / far side round 4 hole 2.5 unplated: ""(91.5,3)

## Via types
v1: diameter 1.27, hole 0.711, Top Layer to Bottom Layer, 20 vias

## Nets (pads, with @x,y where several pads share a name; then routed paths per layer and width w, separated by ;. In a path a pad name is that pad's centre, name@x,y a point inside that pad or via, vN(x,y) a via of type N, cw(c..) or ccw(c..) an arc to the next point about the centre after c; other vN are vias at no path point)
+5V: C3.1 C4.1 C6.1 C37.2 Q1.3 Q2.3 R12.2 R14.2 R41.2 U6.2 U6.4 VD2.2 | length 52.2
  Top Layer w0.5: R12.2 78.7,47.4 R14.2 ; R14.2@78.913,50.213 C3.1@85.5,43.625 ; R41.2 88.3,31.2
  Top Layer w0.75: Q1.3 69.615,33.635 70.75,32.5 80.05,32.5 81.475,33.925 84.925,33.925 85.25,34.25 ; U6.4 85.5,31.9 C3.1@85.5,43.625
  Top Layer w0.9: C6.1@85,27.2 U6.4@85,30.9
+BATT: Q5.3 R20.1 X7.4 | length 30.4
  Top Layer w0.5: R20.1 60.93,3 62.88,4.95 76.45,4.95 X7.4
  Bottom Layer w0.5: Q5.3 76.507,3.75 78.7,5.943 X7.4
+UP: C14.1 C17.2 C23.2 C24.2 C33.1 C34.1 C36.2 C38.2 pad.68 pad.74 pad.75 Q5.2 R2.2 R31.1 R44.2 U3.3 U5.3 U6.3 U7.6 U8.14 U9.3 | length 257.9
  Top Layer w0.5: 12.5,1.3 12.5,12.75 20.885,21.135 U7.6 ; R31.1 54.2,48.25 59.5,48.25 61.05,46.7 65.45,46.7 66.25,47.5 66.25,50.25 C38.2 ; C38.2@68.033,51.5 70.033,53.5 77.507,53.5 79.85,51.157 79.85,51.15 82.75,48.25 87.5,48.25 89.25,46.5 89.25,36.25 U6.3@91.95,33.55
  Top Layer w1: C34.1@11.25,1 47.5,1 ; U5.3 44.85,19.9 47.5,17.25 47.5,1 ; 82.25,1.1 R44.2 ; C36.2 93.25,20 ; U6.3@91.95,33.55 92.2,33.55 93.25,32.5 93.25,20 ; 47.5,1 pad.68 pad.74 72.439,1 74.189,2.75 77.25,2.75 79,1 86.5,1 87.5,2 87.5,4.5 89.5,6.5 91.75,6.5 93.25,8 93.25,20
  Bottom Layer w0.5: Q5.2 76.8,2.8 79.45,5.45 C24.2 C24.2@81.5,5.45 ; R2.2@76.598,10.05 77.75,10.05 78.55,9.25 79.5,9.25 81.5,7.25 C24.2@81.5,5.45 ; U8.14 84.3,7.3 82.45,5.45 C24.2@81.5,5.45
  Bottom Layer w0.75: C17.2 65,3.25 67.25,1 pad.68 pad.74 72.439,1 74.239,2.8 Q5.2
-BATT: C29.1 pad.@91.5,3 Q5.1 Q6.2 R26.1 R40.1 U8.3 U8.5 U8.7 U8.8 X7.2 | length 1.8
  Bottom Layer w1: Q6.2 X7.2@70.05,7.05
BTN0: SW1.1 U2.46 | length 39.5
  Top Layer w0.25: 16.25,36.5 17.75,38 ; 19.5,38 19.75,38.25 U2.46
  Top Layer w0.254: v1@15,36.75 15.25,36.5 16.25,36.5 ; 17.75,38 19.5,38
  Bottom Layer w0.254: v1(15,36.5) 15.502,35.998 15.502,28.372 21.372,22.502 28.372,22.502 32,18.874 SW1.1@32,16 ; SW1.1@25.23,15.23 SW1.1@25.25,15.25
BTN1: SW2.1 U2.45 | length 59.9
  Top Layer w0.25: v1@17,38.75 U2.45
  Top Layer w0.254: v1(16.5,38.5) v1@17,38.75
  Bottom Layer w0.254: v1(16.5,38.5) 16.5,37.46 16.512,37.448 16.512,29.466 16.506,29.46 16.506,28.944 21.944,23.506 28.788,23.506 33.044,19.25 44.543,19.25 50.043,13.75 53.375,13.75 SW2.1@54.5,12.625
BTN2: SW3.1 U2.43 | length 65.7
  Top Layer w0.25: v1(18,40.5) 18.749,40.5 19.499,39.75 U2.43
  Bottom Layer w0.25: v1(18,40.5) 16.75,40.5 15.5,41.75 14.822,41.75 13.99,40.918 13.99,40.082 14,40.072 14,37.178 13.99,37.168 13.99,36.01 15,35 15,28.164 21.164,22 28.164,22 29.75,20.414 29.75,10.75 31.25,9.25 42.367,9.25 SW3.1@44.167,7.45
BTN3: SW4.1 U2.42 | length 53.8
  Top Layer w0.25: v1(15,40.5) 16.25,40.5 17.425,41.675 18.683,41.675 20.108,40.25 U2.42
  Bottom Layer w0.25: v1(15,40.5) 15,38.25 16.01,37.24 16.01,29.674 16.004,29.668 16.004,28.58 21.58,23.004 28.58,23.004 35.584,16 SW4.1@44.167,16
BTN4: SW5.1 U2.41 | length 61.8
  Top Layer w0.25: v1(16.5,42.5) 18.565,42.5 20.315,40.75 U2.41
  Bottom Layer w0.25: v1(16.5,42.5) 14.865,42.5 13.49,41.125 13.49,39.875 13.5,39.865 13.5,37.385 13.49,37.375 13.49,35.803 14.5,34.793 14.5,27.957 20.957,21.5 27.957,21.5 29.25,20.207 29.25,6.666 30.916,5 34.75,5 SW5.1@35.25,5.5
BTN5: SW6.1 U2.40 | length 58.8
  Top Layer w0.25: v1@18,44.25 v1(18,44.5) 18.25,44.5 19.25,43.5 19.25,42.522 20.522,41.25 U2.40
  Bottom Layer w0.25: v1@18,44.25 17.75,44.25 17.25,43.75 15.25,43.75 12.99,41.49 12.99,39.667 13,39.657 13,37.593 12.99,37.583 12.99,35.596 14,34.586 14,27.75 20.75,21 27.75,21 28.75,20 28.75,10.5 25.5,7.25 SW6.1@25.5,7.5
GND: C14.2 C17.1 C19.1 C23.1 C30.1 C33.2 C34.2 GS.1 pad.41 pad.67 pad.71 pad.80 Q6.3 R21.1 U7.7 X5.3 | length 63.7
  Top Layer w0.5: pad.67@21.2,12.55 C33.2 ; C33.2@21.2,17.25 22.35,17.25 24.965,19.865 U7.7 27.885,19.865 30.25,17.5 33.5,17.5 35.25,15.75 38.25,15.75 39.7,17.2 C30.1 ; C23.1 50.25,19 52,20.75 56,20.75 C19.1@57,19.75 ; C19.1@57.2,18.75 R21.1 57.7,15.25 59,15.25 62,12.25 65.5,12.25
  Top Layer w1: GS.1 65.5,12.25 pad.41 ; pad.41@65.5,18 X5.3@65.5,22
  Top Layer w2: C14.2@65.5,8.4 GS.1
  Bottom Layer w2: 65.5,8 GS.1
GND_5V: C3.2 C4.2 C6.2 C8.1 C36.1 C37.1 C40.1 GS.3 J3.2 pad.42 pad.46 pad.47 pad.63 Q3.2 Q7.2 Q8.2 R7.2 R42.2 VD3.1 X5.5 | length 40.8
  Top Layer w0.5: Q3.2 72.95,48.05 pad.47 75.2,47.25 C8.1 ; Q8.2 83.95,14.65 C40.1 86.95,16.2 89.05,18.3 89.05,18.7 88.3,19.45 C36.1 J3.2 87.25,23.8 pad.63
  Top Layer w0.75: R42.2@75,30.8 C37.1
  Top Layer w1: C6.2 pad.63 ; C4.2 pad.46 C3.2
  Top Layer w2: X5.5@68,15.5 X5.5
  Bottom Layer w2: GS.3@67.96,11 67.96,12.732
GND_VDD: C10.1 C11.1 C12.1 C13.1 C21.1 C22.1 C25.1 C26.1 C27.1 C35.2 C38.1 C39.1 C41.2 C42.2 GS.2 LCD1.1 LCD1.5 pad.70 pad.73 Q4.2 R16.2 R27.1@19.5,59 R27.2 R28.1 R48.2 SW1.2 SW2.2 SW3.2 SW4.2 SW5.2 SW6.2 U2.23 U2.35 U2.47 U3.1 U4.4 U4.7 U9.1 U10.1 U10.5 U10.9 U10.11 U10.12 U10.15 VD9.2 X2.3 | length 59.1
  Top Layer w0.25: C13.1 9,32.75 10.365,31.385 10.365,28.885 12.905,26.345 U4.4 ; C22.1@19.55,36.5 19.55,37.05 20.25,37.75 U2.47 ; C25.1@22.6,46.85 23.75,45.7 U2.35 ; U2.23 31.5,42.25 32.45,43.2 C26.1
  Top Layer w0.5: VD9.2 1.8,46.05 0.75,45 0.75,42.21 X2.3 ; v1(7.25,40) R28.1@8.6,40 ; v1(7.25,47.5) R27.2@8.55,47.5 ; C35.2@13.55,49 13.25,49.3 13.25,50 LCD1.1 ; C10.1 19.3,26.25 v1(22.5,26.25) ; C11.1 v1(22.5,26.25) ; C25.1 v1(22.5,48) ; C12.1 23.45,26.25 v1(22.5,26.25) ; C26.1 33.15,44.2 36,44.2 36,44.75 37.8,46.55 Q4.2 ; U9.1@55.723,45.373 U9.1
  Top Layer w1: pad.70 U9.1@55.723,45.373
  other v1: 13.75,24.05 2,27.749 18,36.5 32.5,44.75
GND_VDDA: C2.1 C5.2 C9.1 C15.2 C16.1 C18.1 C20.1 C28.1 GS.4 pad.30 pad.31 pad.40 pad.64 R19.1 U1.4 U2.8 U5.1 X5.1 | length 57.4
  Top Layer w0.25: U2.8 26.75,32.75 27.55,31.95 C18.1@27.55,31.5
  Top Layer w0.5: C18.1 28.05,30.45 28.75,29.75 30.75,29.75 31.5,29 34.3,29 C28.1 ; 41,39.45 C9.1 ; C9.1@45.968,39.473 pad.31 C15.2@48.968,39.473 ; R19.1@55.218,39.473 R19.1 pad.40 C16.1@58.218,39.473 ; U1.4 U1.4@58.373,27.75 ; C5.2@58.5,25.95 C5.2@58.75,26.2 ; pad.30 U1.4@58.373,27.75 ; X5.1 62.2,15.8 59.5,18.5 59.5,20.75 60.25,21.5 60.25,24.7 C5.2@58.75,26.2 ; U1.4@58.373,27.75 58.373,26.627 58.75,26.25 C5.2@58.75,26.2
  Top Layer w1: U5.1 36.85,19.9 36,20.75 pad.64 C28.1 38.2,29.5 C2.1
  Bottom Layer w2: GS.4 63,12.5
I_TX: C8.2 R8.1 U2.19 | length 52.7
  Top Layer w0.25: U2.19 37.25,40.25 ; 71.468,39.5 72.532,39.5
  Top Layer w0.5: 37.25,40.25 40,43 66.25,43 67.25,42 67.25,39.5 71.468,39.5 ; 72.532,39.5 73.982,40.95 R8.1 C8.2
NetBF1_1: BF1.1 X3.1 | length 16.1
  Bottom Layer w0.5: 8.5,9 10.25,9 ; 8.5,14 10.25,12.25 10.25,8.25 12.25,6.25 BF1.1 16.5,8.25
NetBF1_2: BF1.2 R39.2 X3.2 | length 27.6
  Bottom Layer w0.5: 3.5,11.5 3.5,9.25 5.75,7 5.75,5.5 7.25,4 17.5,4 19.05,5.55 19.05,6.3 ; 19.05,8.24 19.05,6.3 ; R39.2 19.05,6.3
NetBQ1_1: BQ1.1 C11.2 R15.1 | length 4.3
  Top Layer w0.25: R15.1@20.15,27.4 C11.2@22.225,29.475
  Top Layer w0.5: C11.2@22.69,29.64 BQ1.1
NetBQ1_2: BQ1.2 C10.2 U2.5 | length 11.9
  Top Layer w0.25: BQ1.2 19.505,32.695 23.664,32.695 25.25,34.282 25.25,34.696 U2.5
  Top Layer w0.5: C10.2@17.81,29.64 BQ1.2
NetBQ2_1: BQ2.1 C42.1 U10.2
NetBQ2_2: BQ2.2 C41.1 U10.3
NetC1_1: C1.1 X5.2 | length 3.2
  Top Layer w0.5: C1.1 62,19.9 X5.2
NetC1_2: C1.2 R3.2 | length 3.8
  Top Layer w0.5: C1.2@61.988,25.95 R3.2@61.988,29.373 ; R3.2@62.238,29.373 R3.2@62.238,29.773
NetC2_2: C2.2 R1.2 R5.1 | length 6.6
  Top Layer w0.5: C2.2 42.9,29.3 R1.2@45.695,29.3 ; R5.1@45.695,25.796 R1.2@45.695,29.3 ; R1.2 R1.2@45.695,29.3
NetC5_1: C5.1 R6.2 | length 3
  Top Layer w0.5: R6.2@55.468,22.623 C5.1@58.468,22.623
NetC7_1: C7.1 R9.2 R13.1 U1.1 | length 10.4
  Top Layer w0.5: C7.1@48.968,25.95 R13.1@48.968,29.323 ; C7.1@49.218,26.023 R9.2@52.218,26.023 ; R9.2@52.218,25.523 54.563,27.868 U1.1
NetC7_2: C7.2 R5.2 R6.1 R9.1 U1.2 | length 13.5
  Top Layer w0.5: R5.2@45.968,22.623 52.218,22.623 52.218,22.773 R6.1@55.468,26.023 ; R6.1@55.833,26.088 U1.2
NetC12_2: C12.2 U2.7 | length 7.1
  Top Layer w0.25: C12.2 24.75,31.75 26.25,33.25 U2.7
NetC16_2: C16.2 R18.1 R19.2 U1.5 | length 8.7
  Top Layer w0.5: R18.1@52.218,36.073 R19.2@55.028,36.073 ; R19.2@55.123,35.978 55.218,36.073 R19.2 C16.2@58.218,36.073 ; U1.5 58.373,35.673 C16.2
NetC19_2: C19.2 pad.39 pad.72 R20.2 R21.2 U2.11 | length 56.6
  Top Layer w0.25: U2.11 28.25,35 pad.39@29.75,33.5 ; pad.39@29.875,33.375 pad.39@29.75,33.5 ; pad.39 pad.39@29.75,33.5
  Top Layer w0.5: R20.2@53.65,2.85 52.75,3.75 52.75,14.7 R21.2 53.8,16.563 53.5,16.863 53.5,17.888 53.8,18.188 C19.2
  Bottom Layer w0.5: pad.39 32,33.5 33,32.5 33,22 35.123,19.877 50.373,19.877 pad.72
NetC24_1: C24.1 R40.2 U8.10 | length 10.8
  Bottom Layer w0.25: R40.2@84.3,2.25 87.05,5 88.493,5 89.618,6.125 89.625,6.125 89.77,6.27 U8.10
  Bottom Layer w0.5: C24.1@81.5,2.05 R40.2@84.1,2.05
NetC28_2: C28.2 L1.1 U5.2 U5.4 | length 10.9
  Top Layer w1: C28.2 36.7,30.7 38.5,32.5 L1.1 41,31.6 U5.4@41,26.8
NetC29_2: C29.2 R24.1 U8.4 VD7.1 | length 10.2
  Bottom Layer w0.5: VD7.1 85.075,15 88.5,15 88.5,14.95 C29.2@88.25,14.7 ; U8.4 88.55,12.25 C29.2
NetC30_2: C30.2 U7.3 | length 6.3
  Top Layer w0.5: U7.3 33.412,21.135 36.3,18.247 C30.2
NetC31_1: C31.1 R49.1 U2.14 | length 6.4
  Top Layer w0.25: U2.14 33.5,37.75 34,37.25 35.45,37.25 C31.1
NetC31_2: C31.2 R29.1 | length 4.3
  Top Layer w0.5: R29.1 33,31 35,33 35.7,33 C31.2
NetC32_1: C32.1 R29.2 R32.1 U7.4 | length 9.2
  Top Layer w0.5: R32.1 30.57,28.2 31.47,27.3 R29.2 32.5,26.8 32.5,22.93 U7.4
NetC32_2: C32.2 pad.66 R32.2 R38.1 U7.5 | length 20.3
  Top Layer w0.5: pad.66 17.75,20 20.155,22.405 U7.5 27.687,22.405 29.5,24.218 R32.2
  Bottom Layer w0.5: R38.1 15,16.55 pad.66
NetC35*_1: 
NetC35*_2: R2-1.1 R2-2.1 R2-3.1 R2-4.1 R2-5.1 X5.4 | length 16.4
  Top Layer w1: X5.4 68.75,19.65 R2-1.1 R2-2.1 R2-3.1 R2-4.1 80.75,23.8
NetC35_1: C35.1 LCD1.2 | length 4
  Top Layer w0.5: C35.1@15.45,49 15.25,49.2 15.25,49.46 LCD1.2
  Bottom Layer w0.5: LCD1.2@17.54,51.54 LCD1.2
NetC40_2: C40.2 R45.2 R46.1 | length 9.2
  Top Layer w0.5: R45.2 85.5,9.25 ; C40.2 85.5,9.25 ; R46.1 85.5,9.25
NetC43_1: C43.1 U10.7
NetC43_2: C43.2 C44.2 R48.1 R49.2
NetC44_1: C44.1 U10.6
NetE1_1: E1.1 U10.16
NetJ3_1: J3.1 Q7.3 R41.1 R43.1 U6.1 | length 18.1
  Top Layer w0.5: R43.1 90,14.2 Q7.3 90,21.05 J3.1 R41.1 91.7,28.4 U6.1
NetLCD1_3: LCD1.3 R27.1@10.45,47.5 R27.3 | length 11.6
  Top Layer w0.5: R27.1@10.45,47.5 v1(11.75,47.5)
  Bottom Layer w0.254: v1(11.75,47.5) 14,49.75 18.5,49.75 20.08,51.33 LCD1.3
NetLCD1_4: LCD1.4 U2.39 | length 13.4
  Top Layer w0.25: v1(19,48) 20,47 20,42.5 20.75,41.75 U2.39
  Bottom Layer w0.25: v1(19,48) 19,48.13 LCD1.4
NetLCD1_6: LCD1.6 U2.38 | length 15.9
  Top Layer w0.25: v1(20.75,48) 20.75,42.5 21,42.25 U2.38
  Bottom Layer w0.25: v1(20.75,48) 20.646,48.104 20.646,48.646 21.75,49.75 25.7,49.75 LCD1.6
NetLCD1_11: LCD1.11 U2.28 | length 19.3
  Top Layer w0.25: U2.28 27.25,49 29.275,51.025 39.675,51.025 LCD1.11
NetLCD1_12: LCD1.12 U2.27 | length 21.2
  Top Layer w0.25: U2.27 27.75,48.75 29.525,50.525 41.715,50.525 LCD1.12
NetLCD1_13: LCD1.13 U2.26 | length 23.1
  Top Layer w0.25: U2.26 28.25,44.754 28.25,48.543 29.732,50.025 43.755,50.025 LCD1.13
NetLCD1_14: LCD1.14 U2.25 | length 24.9
  Top Layer w0.25: U2.25 28.75,48.25 30.025,49.525 45.795,49.525 LCD1.14
NetLCD1_15: LCD1.15 R31.2 | length 3.7
  Top Layer w0.5: R31.2@50.56,48.01 LCD1.15
NetLCD1_16: LCD1.16 Q4.3 | length 6.4
  Top Layer w0.5: 51.5,46 52.25,46.75 52.25,50.25 53.1,51.1 LCD1.16
NetQ1_1: Q1.1 R7.1 R8.2 R42.1 | length 9.6
  Top Layer w0.5: Q1.1 73.18,34.2 R42.1 R7.1@78.25,34.2 ; R42.1@75.25,34.45 R8.2
NetQ1_2: Q1.2 R11.2 VD5.1 | length 13.5
  Top Layer w0.25: Q1.2 70.885,35.885 71.75,36.75 72,36.75 74.25,39 76.5,39 77.425,38.075
  Top Layer w0.5: 77.425,38.075 VD5.1@78.5,38.075 ; VD5.1 79.275,37.55 R11.2
NetQ1_4: Q1.4 R10.2 VD4.2 | length 6.1
  Top Layer w0.5: Q1.4 68.345,37.145 R10.2 71.225,37.55 VD4.2
NetQ1_5: Q1.5 Q1.6 Q1.7 Q1.8 R2-1.2 R2-2.2 R2-3.2 R2-4.2 R2-5.2 VD2.1 VD3.2 | length 19.4
  Top Layer w1: Q1.5 Q1.8 R2-2.2@72.155,27.355 ; R2-1.2 R2-2.2 R2-3.2 ; R2-3.2@75.405,27.355 R2-3.2 ; R2-5.2 R2-4.2 R2-3.2
NetQ2_1: Q2.1 Q3.3 R14.1 VD6.2 | length 17.6
  Top Layer w0.5: R14.1 72.55,50 Q3.3 VD6.2 72.425,45.5 80.125,45.5 Q2.1
NetQ2_2: pad.61 pad.62 Q2.2 R10.1 R11.1 R12.1 VD4.1 VD5.2 VD6.1 | length 22.5
  Top Layer w0.5: R10.1 72,40.95 VD4.1 VD6.1 VD6.1@72,43.825 ; VD5.2@78.5,40.425 VD5.2 VD5.2@78.5,40.95 ; Q2.2 79.125,44.425 R12.1 pad.61 VD5.2@78.5,40.95 ; R11.1 VD5.2@78.5,40.95
  Bottom Layer w0.5: pad.62 pad.61
NetQ3_1: Q3.1 R17.1 | length 5
  Top Layer w0.5: R17.1 71.05,47.85 Q3.1
NetQ4_1: Q4.1 R35.2 | length 12.5
  Top Layer w0.5: R35.2 33.646,48.45 Q4.1
NetQ6_1: Q6.1 U8.13 | length 21
  Bottom Layer w0.25: Q6.1 73.2,8.95 75.5,11.25 77.75,11.25 79,10 80.5,10 81.275,9.225 85.275,9.225 85.96,8.54 U8.13
NetQ7_1: Q7.1 R43.2 R46.2 | length 8.6
  Top Layer w0.5: Q7.1 91.7,16.8 R43.2 R46.2
NetQ8_1: Q8.1 R47.2 | length 4.4
  Top Layer w0.5: Q8.1 82.05,12.6 R47.2
NetQ8_3: Q8.3 R44.1 R45.1 | length 9.2
  Top Layer w0.5: Q8.3 83,7.2 R44.1 85.5,3.2 R45.1
NetR2_1: R2.1 SW7.2 | length 3.9
  Bottom Layer w0.5: R2.1@76.5,12.95 78.3,12.95 SW7.2@79.75,11.5
NetR3_1: R3.1 R4.1 U1.3 VD1.1 | length 16.3
  Top Layer w0.5: VD1.1@52.218,29.848 53.293,29.848 53.968,30.523 57.103,30.523 ; U1.3 57.103,30.523 ; R3.1 R4.1 ; R3.1@62.219,32.504 60.238,30.523 57.103,30.523
NetR15_2: R15.2 U2.6 | length 10.4
  Top Layer w0.25: R15.2 20.25,31 21.445,32.195 24.195,32.195 25.75,33.75 U2.6
NetR16_1: R16.1 U2.20 | length 5.6
  Top Layer w0.25: U2.20 34.606,40.75 35.24,41.384 R16.1
NetR22_2: R22.2 U2.3 U4.6 U10.14 | length 22.9
  Top Layer w0.25: 24.25,34.891 U2.3
  Top Layer w0.254: R22.2@10.927,33.227 10.927,32.323 11.635,31.615 11.635,29.115 12.3,28.45 13.45,28.45 14.25,29.25 14.25,32.5 15.496,33.746 23.104,33.746 24.23,34.872
NetR23_1: R23.1 U2.2 U4.5 U10.13 | length 15
  Top Layer w0.25: 21.5,34.25 22.898,34.25 23.75,35.102 U2.2
  Top Layer w0.254: U4.5@13,30.475 R23.1 13.2,33.25 13.75,33.25 14.75,34.25 21.5,34.25
NetR24_2: R24.2 U8.1 U8.11 VD7.2 | length 15.8
  Bottom Layer w0.25: 84.25,10.05 86.7,10.05 88.5,8.25 U8.11
  Bottom Layer w0.5: R24.2@82.4,15.4 81.5,14.5 81.5,10.75 82.175,10.075 84.44,10.075 U8.1@84.44,11.7
NetR25_1: R25.1 VD9.1 | length 7.4
  Top Layer w0.257: VD9.1 5.2,45.55 6.06,44.69 6.06,42.69 7.25,41.5 8.1,41.5 R25.1@8.6,42
NetR25_2: R25.2 U2.33 | length 22.1
  Top Layer w0.25: R25.2 11.707,41.5 17.75,47.543 17.75,48.5 18.5,49.25 22.75,49.25 24.75,47.25 24.75,46.678 24.76,46.668 24.76,45.832 24.75,45.822 U2.33
NetR26_2: R26.2 SW7.1 U8.6 | length 17.2
  Bottom Layer w0.5: SW7.1@79.75,16 80.75,17 88.5,17 ; R26.2 88.55,17.05 88.5,17 ; U8.6@91.04,11.95 U8.6 91.04,13.21 90.37,13.88 90.37,16.18 89.55,17 88.5,17
NetR28_2: R28.2 R30.2 U2.44 | length 14.1
  Top Layer w0.25: 17,39.75 17.5,39.25 U2.44
  Top Layer w0.254: R30.2@11,37.75 10.75,38 10.5,38 10.5,39.5 10.75,39.25 15.25,39.25 15.75,39.75 17,39.75
NetR30_1: R30.1 X2.4 | length 4.9
  Top Layer w0.254: X2.4 7.5,38 R30.1@8.6,38
NetR33_1: R33.1 U2.31 | length 22.7
  Top Layer w0.25: R33.1 13,43.5 17,47.5 17,48.5 18.25,49.75 23.25,49.75 25.75,47.25 U2.31
NetR33_2: R33.2 X2.1 | length 8.5
  Top Layer w0.5: v1(7.25,43.5) 8.1,43.5 R33.2@8.6,44
  Bottom Layer w0.5: X2.1 2.25,44 3.48,45.23 5.52,45.23 v1(7.25,43.5)
NetR34_1: R34.1 U2.30 | length 23.3
  Top Layer w0.25: R34.1@10.5,46 11,45.5 14.293,45.5 16.25,47.457 16.25,48.5 18,50.25 23.75,50.25 26.25,47.75 U2.30
NetR34_2: R34.2 X2.5 | length 16
  Top Layer w0.5: v1(7.25,45.5) 8.1,45.5 R34.2@8.6,46
  Bottom Layer w0.5: X2.5 0.75,39.67 0.75,44.75 2,46 6.75,46 v1(7.25,45.5)
NetR35_1: pad.29 R35.1 U2.12 | length 14.8
  Top Layer w0.25: U2.12 28.75,35.5 29.158,35.092 pad.29@31.5,35.092
  Bottom Layer w0.5: v1(30.5,46) 30.5,36 pad.29
NetR36_1: U2.37
NetR36_2: 
NetR37_1: U2.34
NetR37_2: 
NetR38_2: R38.2 | length 14.5
  Bottom Layer w0.5: 8.5,6.5 6.75,8.25 6.75,14.75 8.5,16.5 R38.2
NetR39_1: pad.65 R39.1 U7.8 | length 11.5
  Top Layer w0.5: pad.65 23.5,14 23.5,16.75 25.345,18.595 U7.8
  Bottom Layer w0.5: R39.1 23,10.2 23,13 pad.65
NetR47_1: pad.77 pad.78 R47.1 U2.13 | length 76.3
  Top Layer w0.25: U2.13 32.25,37.25 pad.78
  Top Layer w0.5: pad.77 76,17.5 80.95,17.5 R47.1
  Bottom Layer w0.5: pad.78 33,37.062 38.688,42.75 65.838,42.75 66.8,41.788 66.8,24.95 70.25,21.5 pad.77
NetU2_4: U2.4 U7.1 U10.8 | length 17.4
  Top Layer w0.25: 14.85,27.1 14.85,32.1 15.945,33.195 23.457,33.195 24.75,34.489 U2.4
NetU8_9: U8.9 U8.12 | length 28.7
  Bottom Layer w0.25: U8.12 87.23,6.48 84.75,4 80.25,4 79.75,3.5 79.75,1 80.25,0.5 88.25,0.5 88.75,1 88.75,4.05 91.04,6.34 U8.9
SIN_C: R1.1 U2.15 | length 18.8
  Top Layer w0.25: U2.15 34,38.25
  Top Layer w0.5: 34,38.25 37.25,38.25 38.25,37.25 42.5,37.25 44.25,35.5 44.25,34.2 R1.1
TX: R17.2 U2.21 | length 36.1
  Top Layer w0.25: U2.21 32.75,41.25 34.5,43 36.572,43
  Top Layer w0.5: 36.572,43 38.5,43 39.5,44 63.78,44 64.55,44.77 R17.2@64.633,44.77
U_RX: C9.2 R13.2 U2.17 | length 21.6
  Top Layer w0.25: U2.17 32.5,39.25
  Top Layer w0.5: 32.5,39.25 37.75,39.25 38.75,38.25 42.85,38.25 45.05,36.05 C9.2 ; C9.2@45.968,36.073 46.118,36.073 R13.2@49.218,32.973
VDD: C13.2 C21.2 C22.2 C25.2 C26.2 C27.2 R22.1 R23.2 U2.1 U2.24 U2.36 U2.48 U3.2 U3.4 U4.8 U10.4 U10.10 X2.2 | length 57.5
  Top Layer w0.25: U3.4 3.5,36.2 3.5,41.96 X2.2 ; 23.244,37.256 23.244,44.025 U2.36 ; U2.1 23.25,37.234 ; 23.5,42.85 C26.2@30.275,42.85
  Top Layer w0.254: U2.48 23.236,37.248 23.25,37.234
  Top Layer w0.5: 4.75,32.3 7.27,32.3 U4.8 ; U3.4@4.75,35.249 4.999,35.249 5.75,36 13.49,36 14.49,35 20.988,35 23.236,37.248 23.244,37.256 ; 6.25,35.75 13.75,35.75
VDDA: C15.1 C18.2 C20.2 L1.2 R18.2 U1.8 U2.9 VD1.2 | length 45.8
  Top Layer w0.25: U2.9 27.25,34 29.45,31.8 C18.2@29.45,31.5
  Top Layer w0.5: C18.2@29.975,31.225 33.75,35 38.25,35 39.3,36.05 C20.2 41,36.05 42.9,34.15 L1.2 44.327,31.073 51.043,31.073 52.218,32.248 52.218,33.423 ; R18.2@52.218,39.473 48.973,36.227 48.973,36.077 48.968,36.073 51.618,33.423 52.218,33.423 ; U1.8 52.218,33.423
VLCD: C39.2 U9.2 U9.4 | length 40.7
  Top Layer w0.5: 18.5,53.5 38.317,53.5 57.65,53.5 U9.4
ZERO: R4.2 U1.6 U1.7 | length 15.2
  Top Layer w0.5: U1.7 55.833,32.158 56.218,31.773 57.218,31.773 57.103,31.888 U1.6 ; 57.368,31.773 59.023,31.773 60.5,33.25 60.5,37.735 R4.2@62.238,39.473
pads on no net: U2.10 U2.16 U2.18 U2.22 U2.29 U2.32 U4.1 U4.2 U4.3 U7.2 U8.2 X2.6 X7.1 X7.3

## Polygon pours and split planes (outlines as drawn)
GND_5V on Bottom Layer "GND_5V" (solid, remove dead copper, pour order 4): 65.5,54 94,54 94,17 75.5,17 70.187,12 65.5,12
GND on Bottom Layer "GND" (solid, remove dead copper, pour order 3): 0,17.5 0,21.544 22.5,21.544 22.5,3.25 59.75,3.25 61.75,5.25 61.75,11.75 63.5,11.75 67,8.25 67,4.3 71.3,0 0,0
GND_VDD on Bottom Layer "GND_VDD" (solid, remove dead copper, pour order 2): 0,54 65.505,54 65.505,42.5 40.083,42.5 33.51,32.64 33.51,21.49 34.75,20.25 53,20.25 61.5,11.75 61.5,5.25 58.75,2.5 22.75,2.5 22.75,14.75 16.25,21.25 0,21.25
GND_VDDA on Bottom Layer "GND_VDDA" (solid, remove dead copper, pour order 1): 42.25,42.25 60.5,42.25 66.25,42.25 66.25,23.25 65.5,23.25 65.5,11.75 61.75,11.75 56.5,17 32.25,17 32.25,42.25
-BATT on Bottom Layer "GND_BAT" (solid, remove dead copper, pour order 0): 94,0 94,20.25 84.25,20.25 82.25,18.25 75.75,18.25 67.25,9.75 67.25,0

## Other copper
Top Layer:
  rectangle: 62.75,9.25 67.3,10
  rectangle net VDD: 23.15,37.15 28.85,42.85
  region net +5V: 83.75,33.25 85.1,34.6 89.55,34.6 89.55,32 90.5,32 90.5,30.5 89.55,30.5 89.55,27.9 86.45,27.9 85.1,27.9 83.75,29.25
  region net VDD: 21.75,37.25 23.238,37.25 21.75,35.762
  region net NetC28_2: 42.4,27.35 43.75,26 43.75,21.55 41.15,21.55 41.15,20.6 39.65,20.6 39.65,21.55 37.05,21.55 37.05,24.65 37.05,26 38.4,27.35
  region net VDD: 6.132,36.55 7.6,34.95 7.6,30.5 5,30.5 5,29.55 3.5,29.55 3.5,30.5 0.75,30.5 0.75,33.6 0.75,34.95 2.35,36.55
  text "QUASAR ARM / V3.1" at 33.5,1.75 h1
Bottom Layer:
  rectangle net GND_VDD: 60,7.489 61.5,9.576

## Silkscreen, mask and mechanical layers (free items; w line width, h text height)
Mechanical 15:
  the board outline again, w0.1